# Altium PCB SV06.PcbDoc (part 1 of 3)
Units mil, origin at the board's own origin, x right, y up, seen from the top; angles counter-clockwise.
Board outline 3960.63 x 2763.78 mil, 2 copper layers (Top, Bottom), stack 12.7 mil thick; 211 components, 173 nets, 726 pads, 644 vias.
Unrouted connection lines stored in the file: 411.
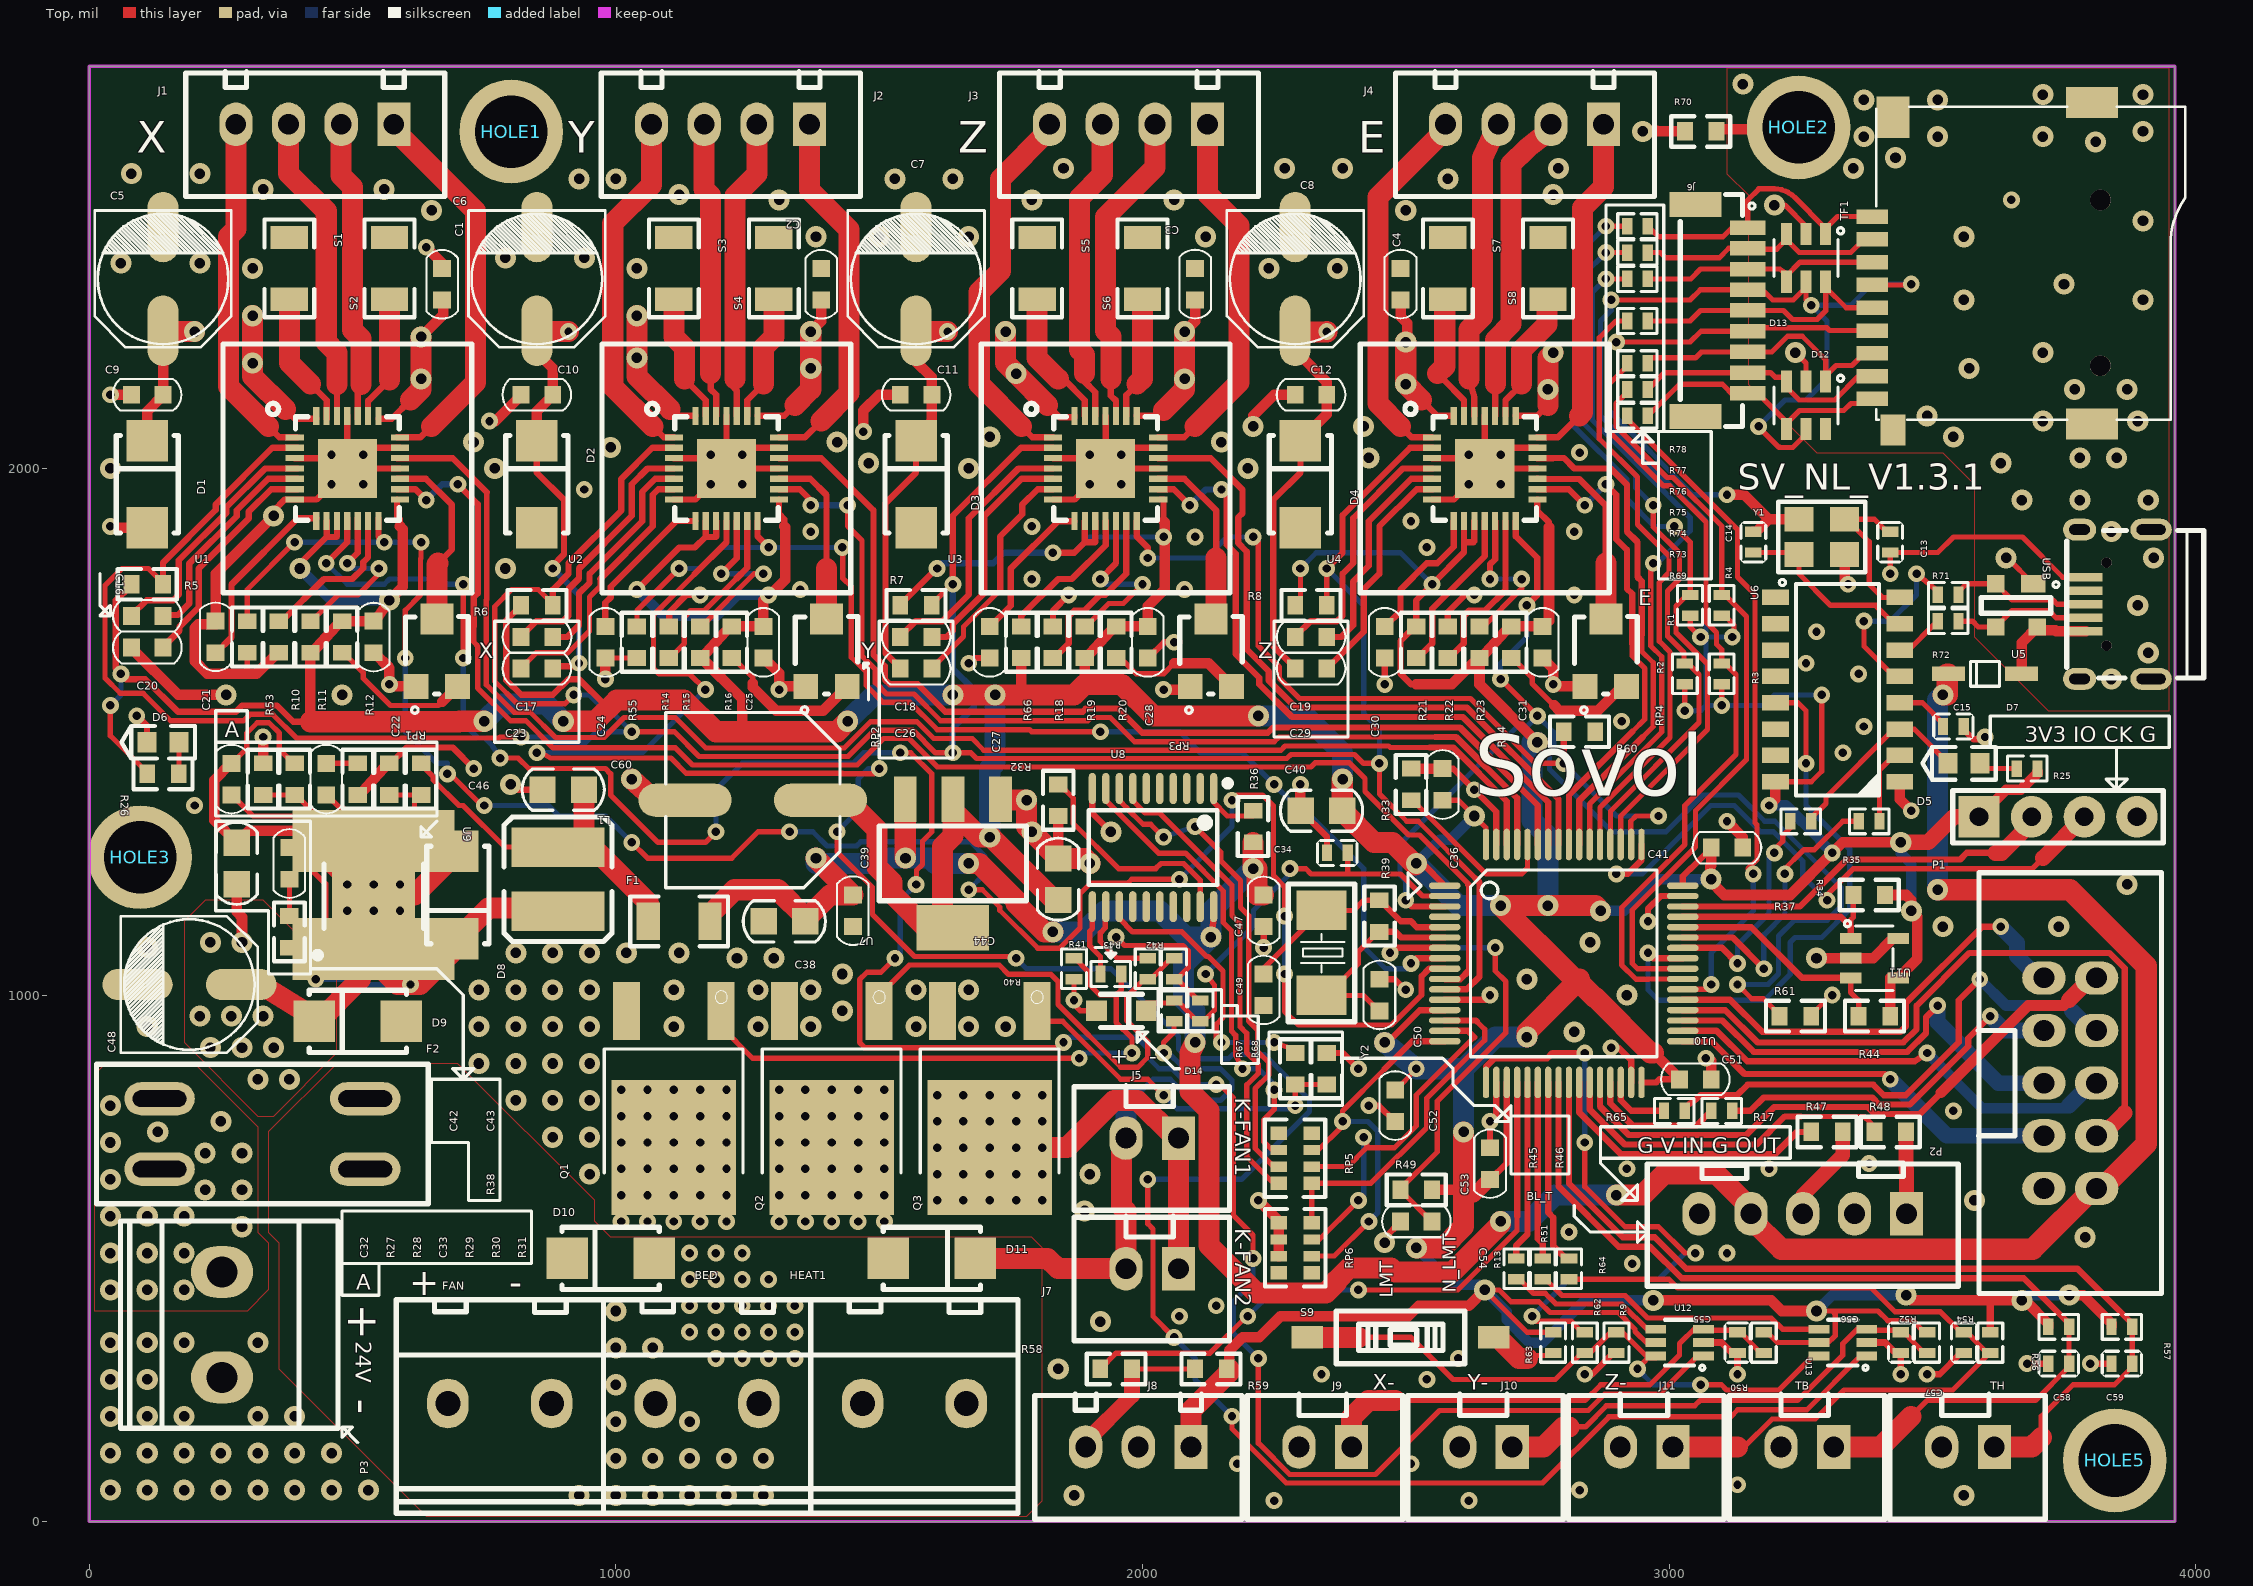
[diagram p0: Top view]
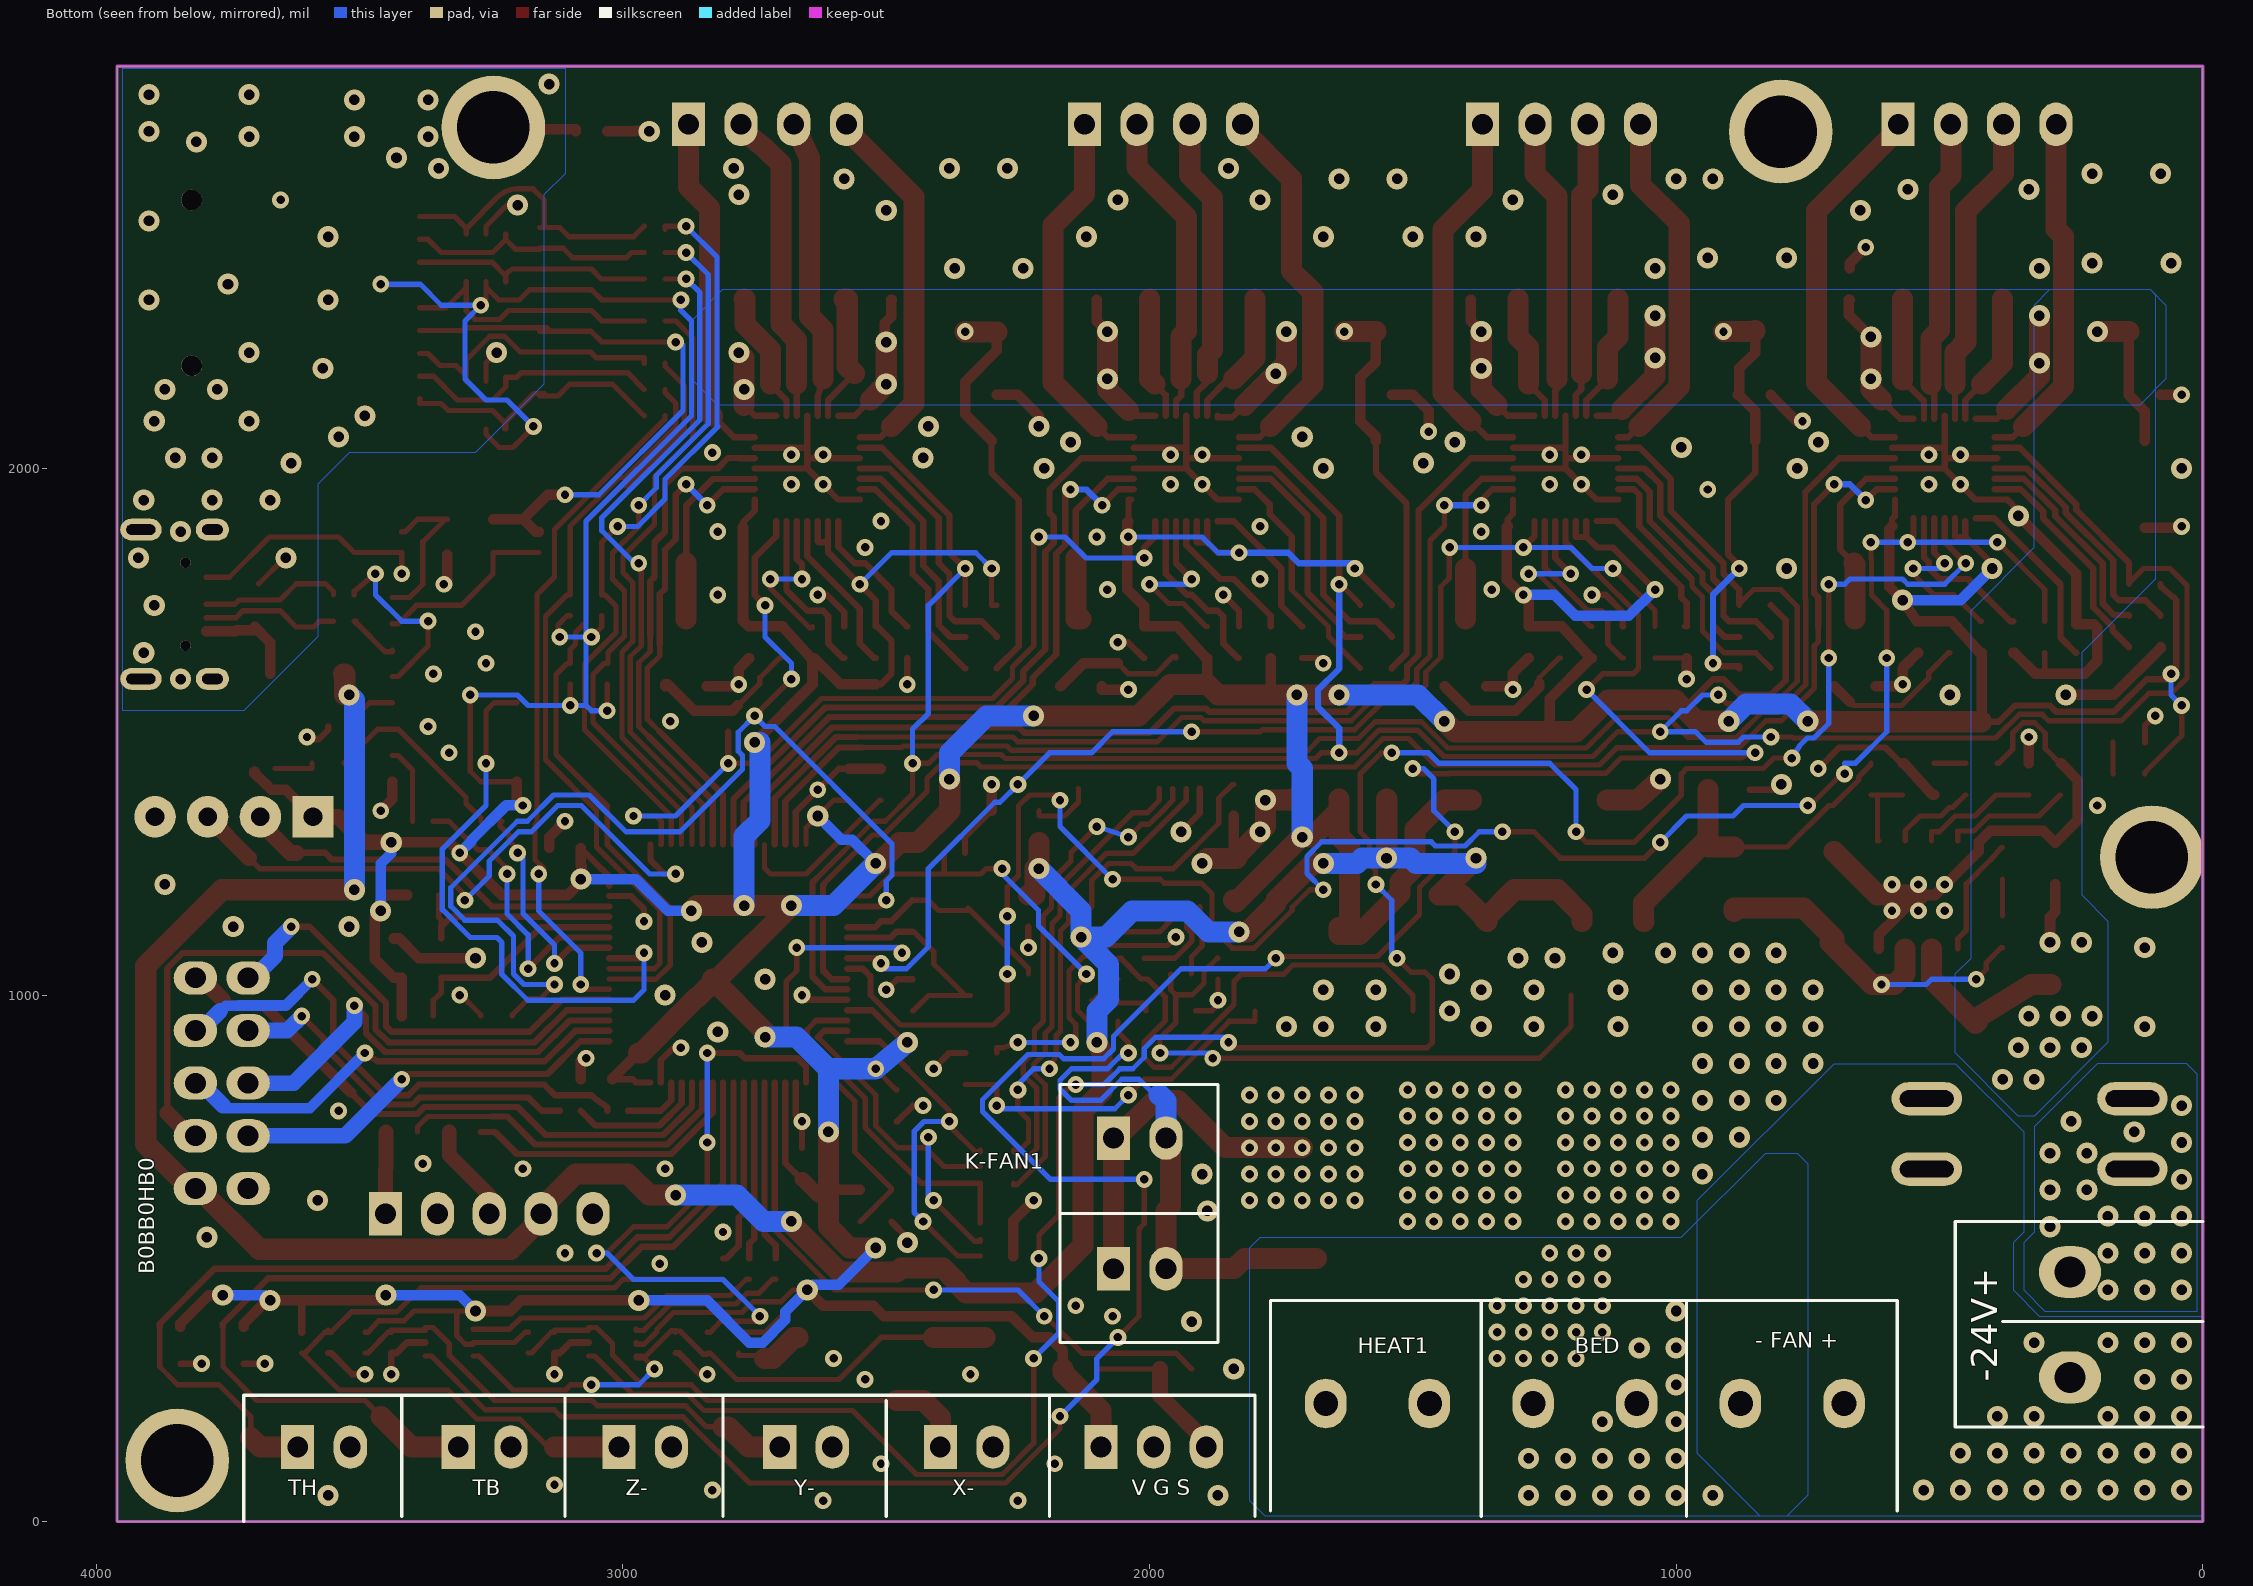
[diagram p1: Bottom view, seen from below]

## Layer stack, top to bottom
Solder Mask Top: solder mask 0.4, Solder Resist, Dk 3.5
Top: signal copper 1.35
Dielectric 1: dielectric 10, FR-4, Dk 4.3
Bottom: signal copper 1.35
Solder Mask Bottom: solder mask 0.4, Solder Resist, Dk 3.5

## Board outline
0,0 3960.63,0 3960.63,2763.78 0,2763.78

## Design rules (kind name [scope] priority, off if disabled: settings)
AssemblyTestPointUsage [All] p0: scope1count=1 scope1_0_kind=Board scope1_0_value=Board scope2count=1 scope2_0_kind=Board scope2_0_value=Board commentlength=0
AssemblyTestpoint [All] p0: scope1count=1 scope1_0_kind=Board scope1_0_value=Board scope2count=1 scope2_0_kind=Board scope2_0_value=Board commentlength=0
Clearance "Clearance - Default - DEFAULT - Net" [All] p0: scope1count=1 scope1_0_kind=Board scope1_0_value=Board scope2count=1 scope2_0_kind=Board scope2_0_value=Board commentlength=0 gap=6
Clearance "Clearance - Default - DEFAULT - Via" [All] p0 off: scope1count=1 scope1_0_kind=Board scope1_0_value=Board scope2count=1 scope2_0_kind=Board scope2_0_value=Board commentlength=44 gap=6 // Protel DXP Scope 2 Expression Was: IsVia
Clearance "Clearance - Default - DEFAULT- SMD" [All] p0 off: scope1count=1 scope1_0_kind=Board scope1_0_value=Board scope2count=1 scope2_0_kind=Board scope2_0_value=Board commentlength=47 gap=6 // Protel DXP Scope 2 Expression Was: IsSMTPin
Clearance "Clearance - Default - DEFAULT- SMD" [IsVia vs IsSMTPin] p1: gap=6
Clearance "Clearance - Default - DEFAULT - Via" [IsVia vs IsVia] p2: gap=6
Clearance "Clearance - Default - DEFAULT - Net" [All] p3: gap=6 except(8: Arc-Fill Arc-Poly Arc-Region Track-Fill Track-Poly Track-Region SMDPad-Fill SMDPad-Poly SMDPad-Region THPad-Fill THPad-Poly THPad-Region Via-Fill Via-Poly Via-Region; 10: Fill-Fill Fill-Poly Fill-Region Poly-Poly Poly-Region Region-Region Text-Text)
ComponentClearance "ComponentClearance - Default - DEFAULT" [All] p0: scope1count=1 scope1_0_kind=Board scope1_0_value=Board scope2count=1 scope2_0_kind=Board scope2_0_value=Board commentlength=0 gap=6 collisioncheckmode=3
ComponentClearance "ComponentClearance - Default - DEFAULT" [All] p1: gap=6 collisioncheckmode=3 verticalgap=10 showdistances=FALSE
DiffPairsRouting [All] p0: scope1count=1 scope1_0_kind=Board scope1_0_value=Board scope2count=1 scope2_0_kind=Board scope2_0_value=Board commentlength=0
FabricationTestPointUsage [All] p0: scope1count=1 scope1_0_kind=Board scope1_0_value=Board scope2count=1 scope2_0_kind=Board scope2_0_value=Board commentlength=0 valid=0 allowmultiple=FALSE
FabricationTestpoint [All] p0: scope1count=1 scope1_0_kind=Board scope1_0_value=Board scope2count=1 scope2_0_kind=Board scope2_0_value=Board commentlength=0 side=3 testpointundercomponent=TRUE minsize=40 maxsize=100 preferedsize=60 minholesize=0 maxholesize=40 preferedholesize=32 testpointgrid=1
FanoutControl Fanout_Default [All] p0: scope1count=1 scope1_0_kind=Board scope1_0_value=Board scope2count=1 scope2_0_kind=Board scope2_0_value=Board commentlength=30 // Fanout_Default (Default Rule)
FanoutControl Fanout_SOIC [All] p0 off: scope1count=1 scope1_0_kind=Board scope1_0_value=Board scope2count=1 scope2_0_kind=Board scope2_0_value=Board commentlength=71 // Protel DXP Scope 1 Expression Was: IsSOIC   Fanout_SOIC (Default Rule)
FanoutControl Fanout_Small [All] p0 off: scope1count=1 scope1_0_kind=Board scope1_0_value=Board scope2count=1 scope2_0_kind=Board scope2_0_value=Board commentlength=84 // Protel DXP Scope 1 Expression Was: (CompPinCount < 5)   Fanout_Small (Default Rule)
FanoutControl Fanout_LCC [All] p0 off: scope1count=1 scope1_0_kind=Board scope1_0_value=Board scope2count=1 scope2_0_kind=Board scope2_0_value=Board commentlength=69 // Protel DXP Scope 1 Expression Was: IsLCC   Fanout_LCC (Default Rule)
FanoutControl Fanout_BGA [All] p0 off: scope1count=1 scope1_0_kind=Board scope1_0_value=Board scope2count=1 scope2_0_kind=Board scope2_0_value=Board commentlength=69 // Protel DXP Scope 1 Expression Was: IsBGA   Fanout_BGA (Default Rule)
FanoutControl Fanout_Small [(CompPinCount < 5)] p3: bgadir=Out bgaviamode=Centered fanoutstyle=Auto fanoutdirection=OutThenIn viagrid=1 // Fanout_Small (Default Rule)
FanoutControl Fanout_SOIC [IsSOIC] p4: bgadir=Out bgaviamode=Centered fanoutstyle=Auto fanoutdirection=Alternating viagrid=1 // Fanout_SOIC (Default Rule)
Height [All] p0: scope1count=1 scope1_0_kind=Board scope1_0_value=Board scope2count=1 scope2_0_kind=Board scope2_0_value=Board commentlength=0
HoleSize [All] p0: scope1count=1 scope1_0_kind=Board scope1_0_value=Board scope2count=1 scope2_0_kind=Board scope2_0_value=Board commentlength=0 absolutevalues=TRUE maxlimit=100 minlimit=1 maxpercent=80.000 minpercent=20.000
HoleToHoleClearance "HoleToHoleClearance - Default - DEFAULT" [All] p0: scope1count=1 scope1_0_kind=Board scope1_0_value=Board scope2count=1 scope2_0_kind=Board scope2_0_value=Board commentlength=0
HoleToHoleClearance "HoleToHoleClearance - Default - DEFAULT" [All] p1: gap=6 allowstackedmicrovias=TRUE
LayerPairs [All] p0: scope1count=1 scope1_0_kind=Board scope1_0_value=Board scope2count=1 scope2_0_kind=Board scope2_0_value=Board commentlength=0 enforce=TRUE
Length "Default Length" [All] p0: scope1count=1 scope1_0_kind=Board scope1_0_value=Board scope2count=1 scope2_0_kind=Board scope2_0_value=Board commentlength=0 maxlimit=50000 minlimit=0
Length "Default Length" [All] p1: maxlimit=50000 minlimit=0
MaxMinImpedance "Default Impedance" [All] p0: scope1count=1 scope1_0_kind=Board scope1_0_value=Board scope2count=1 scope2_0_kind=Board scope2_0_value=Board commentlength=0 minimum=50.00 maximum=150.0
MaxMinImpedance "Default Impedance" [All] p1: minimum=50.00 maximum=150.0
MinimumSolderMaskSliver [All] p0: scope1count=1 scope1_0_kind=Board scope1_0_value=Board scope2count=1 scope2_0_kind=Board scope2_0_value=Board commentlength=0
NetAntennae [All] p0: scope1count=1 scope1_0_kind=Board scope1_0_value=Board scope2count=1 scope2_0_kind=Board scope2_0_value=Board commentlength=0
ParallelSegment "Default Parallel Segment Same Layer" [All] p0: scope1count=1 scope1_0_kind=Board scope1_0_value=Board scope2count=1 scope2_0_kind=Board scope2_0_value=Board commentlength=0 limit=1000 gap=200
ParallelSegment "Default Parallel Segment Adjasent" [All] p0: scope1count=1 scope1_0_kind=Board scope1_0_value=Board scope2count=1 scope2_0_kind=Board scope2_0_value=Board commentlength=0 limit=1000 gap=200
ParallelSegment "Default Parallel Segment Adjasent" [All] p1: limit=1000 gap=200
ParallelSegment "Default Parallel Segment Same Layer" [All] p2: limit=1000 gap=200
PasteMaskExpansion [All] p0: scope1count=1 scope1_0_kind=Board scope1_0_value=Board scope2count=1 scope2_0_kind=Board scope2_0_value=Board commentlength=0 expansion=0
PlaneClearance [All] p0: scope1count=1 scope1_0_kind=Board scope1_0_value=Board scope2count=1 scope2_0_kind=Board scope2_0_value=Board commentlength=0 clearance=20
PlaneConnect "Default PlaneConnect" [All] p0: scope1count=1 scope1_0_kind=Board scope1_0_value=Board scope2count=1 scope2_0_kind=Board scope2_0_value=Board commentlength=0 planeconnectstyle=Relief reliefexpansion=20 reliefentries=0 reliefconductorwidth=15 reliefairgap=10
PlaneConnect "Default PlaneConnect" [All] p1: planeconnectstyle=Relief reliefexpansion=20 reliefentries=0 reliefconductorwidth=15 reliefairgap=10
PolygonConnect "PolygonConnect - Default Pad" [All] p0: scope1count=1 scope1_0_kind=Board scope1_0_value=Board scope2count=1 scope2_0_kind=Board scope2_0_value=Board commentlength=0 connectstyle=Relief reliefconductorwidth=15 reliefentries=4 polygonreliefangle="45 Angle"
PolygonConnect "PolygonConnect - Default SMT" [All] p0 off: scope1count=1 scope1_0_kind=Board scope1_0_value=Board scope2count=1 scope2_0_kind=Board scope2_0_value=Board commentlength=47 connectstyle=Relief reliefconductorwidth=15 reliefentries=4 polygonreliefangle="90 Angle" // Protel DXP Scope 1 Expression Was: IsSMTPin
PolygonConnect "PolygonConnect - Default SMT" [IsSMTPin] p1: connectstyle=Relief reliefconductorwidth=15 reliefentries=4 polygonreliefangle="90 Angle" airgapwidth=10
PolygonConnect "PolygonConnect - Default Pad" [All] p2: connectstyle=Relief reliefconductorwidth=15 reliefentries=4 polygonreliefangle="45 Angle" airgapwidth=10
RoutingCorners [All] p0: scope1count=1 scope1_0_kind=Board scope1_0_value=Board scope2count=1 scope2_0_kind=Board scope2_0_value=Board commentlength=0 cornerstyle=45-Degree minsetback=100 maxsetback=100
RoutingLayers "RoutingLayers - Default - DEFAULT" [All] p0: scope1count=1 scope1_0_kind=Board scope1_0_value=Board scope2count=1 scope2_0_kind=Board scope2_0_value=Board commentlength=0 top layer=Automatic bottom layer=Automatic
RoutingLayers "RoutingLayers - Default - DEFAULT" [All] p1: top layer_v5=TRUE bottom layer_v5=TRUE
RoutingPriority "RoutingPriority - Default - DEFAULT" [All] p1: routingpriority=3
RoutingPriority "RoutingPriority - Default - DEFAULT" [All] p3: scope1count=1 scope1_0_kind=Board scope1_0_value=Board scope2count=1 scope2_0_kind=Board scope2_0_value=Board commentlength=0
RoutingTopology "Default Routing Topology" [All] p0: scope1count=1 scope1_0_kind=Board scope1_0_value=Board scope2count=1 scope2_0_kind=Board scope2_0_value=Board commentlength=0 topology=Shortest
RoutingTopology "Default Routing Topology" [All] p1: topology=Shortest
RoutingVias "RoutingVias - Default - DEFAULT" [All] p0: scope1count=1 scope1_0_kind=Board scope1_0_value=Board scope2count=1 scope2_0_kind=Board scope2_0_value=Board commentlength=0 holewidth=16 width=32 viastyle="Through Hole" minholewidth=16 minwidth=32 maxholewidth=16 maxwidth=32
RoutingVias "RoutingVias - Default - DEFAULT" [All] p1: holewidth=16 width=32 viastyle="Through Hole" minholewidth=16 minwidth=32 maxholewidth=16 maxwidth=32
SMDToCorner "SMDToCorner - Default - DEFAULT" [All] p0: scope1count=1 scope1_0_kind=Board scope1_0_value=Board scope2count=1 scope2_0_kind=Board scope2_0_value=Board commentlength=0 distance=60000
SMDToCorner "SMDToCorner - Default - DEFAULT" [All] p1: distance=60000
ShortCircuit [All] p0: scope1count=1 scope1_0_kind=Board scope1_0_value=Board scope2count=1 scope2_0_kind=Board scope2_0_value=Board commentlength=0 allowed=FALSE
SilkToBoardRegionClearance [All] p0: scope1count=1 scope1_0_kind=Board scope1_0_value=Board scope2count=1 scope2_0_kind=Board scope2_0_value=Board commentlength=0
SilkToSilkClearance [All] p0: scope1count=1 scope1_0_kind=Board scope1_0_value=Board scope2count=1 scope2_0_kind=Board scope2_0_value=Board commentlength=0
SilkToSolderMaskClearance [All] p0 off: scope1count=1 scope1_0_kind=Board scope1_0_value=Board scope2count=1 scope2_0_kind=Board scope2_0_value=Board commentlength=44 // Protel DXP Scope 1 Expression Was: IsPad
SolderMaskExpansion [All] p0: scope1count=1 scope1_0_kind=Board scope1_0_value=Board scope2count=1 scope2_0_kind=Board scope2_0_value=Board commentlength=0 expansion=4
SolderMaskExpansion [All] p1: expansion=4
UnRoutedNet [All] p0: scope1count=1 scope1_0_kind=Board scope1_0_value=Board scope2count=1 scope2_0_kind=Board scope2_0_value=Board commentlength=0
UnpouredPolygon [All] p0: scope1count=1 scope1_0_kind=Board scope1_0_value=Board scope2count=1 scope2_0_kind=Board scope2_0_value=Board commentlength=0
Width "Default Width" [All] p0: scope1count=1 scope1_0_kind=Board scope1_0_value=Board scope2count=1 scope2_0_kind=Board scope2_0_value=Board commentlength=0 maxlimit=250 minlimit=6 preferedwidth=12
Width "Default Width" [All] p1: maxlimit=250 minlimit=6 preferedwidth=12
22 further rules are at their usual default settings.

## Components (designator, comment, footprint, x,y, rotation, side; value= is the part's Value field where it differs from the comment)
BED "CONN-TH_2P-P5.00_WJ128V-5.0-2P_2X2.4_10" CONN-TH_2P-P5.00_WJ128V-5.0-2P_2X2.4_10 1173.23,224.41 r0 top
BL_T "2.54_XH-5A_SX_X_1_1.6_2.1" 2.54_XH-5A_SX_X_1_1.6_2.1 3253.94,584.65 r180 top
C1 "C0603" C0603 670,2350 r270 top
C2 "C0603" C0603 1390,2350 r270 top
C3 "C0603" C0603 2100,2350 r90 top
C4 "C0603" C0603 2490,2350 r90 top
C5 "ECAP_SMD_6D_X_1.5X3.4" ECAP_SMD_6D_X_1.5X3.4 140,2360 r180 top
C6 "ECAP_SMD_6D_X_1.5X3.4" ECAP_SMD_6D_X_1.5X3.4 850,2360 r180 top
C7 "ECAP_SMD_6D_X_1.5X3.4" ECAP_SMD_6D_X_1.5X3.4 1570,2360 r180 top
C8 "ECAP_SMD_6D_X_1.5X3.4" ECAP_SMD_6D_X_1.5X3.4 2290,2360 r180 top
C9 "C0603" C0603 110,2140 r180 top
C10 "C0603" C0603 850,2140 r180 top
C11 "C0603" C0603 1570,2140 r0 top
C12 "C0603" C0603 2320,2140 r0 top
C13 "C0402_LC" C0402_LC 3420,1860 r90 top
C14 "C0402_LC" C0402_LC 3160,1860 r90 top
C15 "C0402_LC" C0402_LC 3540,1510 r0 top
C16 "C0603" C0603 110,1720 r0 top
C17 "C0603" C0603 850,1680 r0 top
C18 "C0603" C0603 1570,1680 r0 top
C19 "C0603" C0603 2320,1680 r0 top
C20 "C0603" C0603 110,1660 r0 top
C21 "C0603" C0603 240,1680 r90 top
C22 "C0603" C0603 540,1680 r270 top
C23 "C0603" C0603 850,1620 r180 top
C24 "C0603" C0603 980,1670 r270 top
C25 "C0603" C0603 1280,1670 r270 top
C26 "C0603" C0603 1570,1620 r0 top
C27 "C0603" C0603 1710,1670 r270 top
C28 "C0603" C0603 2010,1670 r270 top
C29 "C0603" C0603 2320,1620 r0 top
C30 "C0603" C0603 2460,1670 r270 top
C31 "C0603" C0603 2760,1670 r270 top
C32 "C0603" C0603 270,1410 r90 top
C33 "C0603" C0603 450,1410 r90 top
C34 "C0402_LC" C0402_LC 2370,1270 r180 top
C36 "C0603" C0603 2570,1400 r270 top
C38 "C0805" C0805 1320,1140 r180 top
C39 "C0603" C0603 1450,1160 r90 top
C40 "C0805" C0805 2340,1350 r0 top
C41 "C0603" C0603 3110,1280 r180 top
C42 "C0805" C0805 280,1250 r90 top
C43 "C0603" C0603 380,1250 r270 top
C44 "C0805" C0805 1840,1220 r90 top
C46 "C0805" C0805 900,1390 r180 top
C47 "C0603" C0603 2230,1160 r270 top
C48 "ECAP_SMD_6D_X_1.5X3.4" ECAP_SMD_6D_X_1.5X3.4 190,1020 r270 top
C49 "C0603" C0603 2230,1010 r270 top
C50 "C0603" C0603 2450,1000 r90 top
C51 "C0603" C0603 3050,840 r180 top
C52 "C0603" C0603 2480,790 r90 top
C53 "C0603" C0603 2660,680 r270 top
C54 "C0603" C0603 2520,570 r0 top
C55 "C0402_LC" C0402_LC 3130,340 r90 top
C56 "C0402_LC" C0402_LC 3440,340 r90 top
C57 "C0402_LC" C0402_LC 3560,340 r90 top
C58 "C0402_LC" C0402_LC 3740,300 r180 top
C59 "C0402_LC" C0402_LC 3860,300 r180 top
C60 "CAP-SMD_BD8.0-L8.3-W8.3-FD_2" CAP-SMD_BD8.0-L8.3-W8.3-FD_2 1260,1370 r180 top
D1 "LC-SMA(DO-214AC)_S1" LC-SMA(DO-214AC)_S1 110,1970 r270 top
D2 "LC-SMA(DO-214AC)_S1" LC-SMA(DO-214AC)_S1 850,1970 r270 top
D3 "LC-SMA(DO-214AC)_S1" LC-SMA(DO-214AC)_S1 1570,1970 r270 top
D4 "LC-SMA(DO-214AC)_S1" LC-SMA(DO-214AC)_S1 2300,1970 r270 top
D5 "LC-0603_LED_S3" LC-0603_LED_S3 3560,1440 r0 top
D6 "LC-0603_LED_S3" LC-0603_LED_S3 140,1480 r0 top
D7 "WH-SOD-123" WH-SOD-123 3600,1610 r0 top
D8 "LC-SMA(DO-214AC)_S1" LC-SMA(DO-214AC)_S1 700,1190 r90 top
D9 "LC-SMA(DO-214AC)_S1" LC-SMA(DO-214AC)_S1 510,950 r0 top
D10 "LC-SMA(DO-214AC)_S1" LC-SMA(DO-214AC)_S1 990,500 r0 top
D11 "LC-SMA(DO-214AC)_S1" LC-SMA(DO-214AC)_S1 1600,500 r180 top
D12 "SOT-23-6_L2.9-W1.6-P0.95-LS2.8-BL_2" SOT-23-6_L2.9-W1.6-P0.95-LS2.8-BL_2 3260,2120 r180 top
D13 "SOT-23-6_L2.9-W1.6-P0.95-LS2.8-BL_2" SOT-23-6_L2.9-W1.6-P0.95-LS2.8-BL_2 3260,2400 r180 top
D14 "SOD-323_L1.8-W1.3-LS2.5-RD" SOD-323_L1.8-W1.3-LS2.5-RD 1960,970 r180 top
F1 "LC-1206_R" LC-1206_R 1120,1140 r0 top
F2 "Z-506B" Z-506B 328.74,736.22 r0 top
FAN "CONN-TH_2P-P5.00_WJ128V-5.0-2P_2X2.4_10" CONN-TH_2P-P5.00_WJ128V-5.0-2P_2X2.4_10 779.53,224.41 r0 top
HEAT1 "CONN-TH_2P-P5.00_WJ128V-5.0-2P_2X2.4_10" CONN-TH_2P-P5.00_WJ128V-5.0-2P_2X2.4_10 1566.93,224.41 r0 top
HOLE1 "MACH3.5_5" MACH3.5_5 801.18,2639.76 r0 top
HOLE2 "MACH3.5_5" MACH3.5_5 3246.06,2647.64 r0 top
HOLE3 "MACH3.5_5" MACH3.5_5 96.46,1261.81 r0 top
HOLE5 "MACH3.5_5" MACH3.5_5 3846.46,116.14 r0 top
J1 "2.54_XH-4A_SX_X_1_1.6_2.1" 2.54_XH-4A_SX_X_1_1.6_2.1 478.35,2653.54 r180 top
J2 "2.54_XH-4A_SX_X_1_1.6_2.1" 2.54_XH-4A_SX_X_1_1.6_2.1 1267.72,2653.54 r180 top
J3 "2.54_XH-4A_SX_X_1_1.6_2.1" 2.54_XH-4A_SX_X_1_1.6_2.1 2023.62,2653.54 r180 top
J4 "2.54_XH-4A_SX_X_1_1.6_2.1" 2.54_XH-4A_SX_X_1_1.6_2.1 2775.59,2653.54 r180 top
J5 "2.54_XH-2A_SX_X_1_1.6_2.1" 2.54_XH-2A_SX_X_1_1.6_2.1 1968.5,728.35 r180 top
J6 "CONN-SMD_9P-P1.00_HCTL_HC-1.0-9PL_2" CONN-SMD_9P-P1.00_HCTL_HC-1.0-9PL_2 3100,2300 r270 top
J7 "2.54_XH-2A_SX_X_1_1.6_2.1" 2.54_XH-2A_SX_X_1_1.6_2.1 1968.5,480.31 r180 top
J8 "2.54_XH-3A_SX_1_1.6_2.1" 2.54_XH-3A_SX_1_1.6_2.1 1992.13,141.73 r180 top
J9 "2.54_XH-2A_SX_X_1_1.6_2.1" 2.54_XH-2A_SX_X_1_1.6_2.1 2297.24,141.73 r180 top
J10 "2.54_XH-2A_SX_X_1_1.6_2.1" 2.54_XH-2A_SX_X_1_1.6_2.1 2602.36,141.73 r180 top
J11 "2.54_XH-2A_SX_X_1_1.6_2.1" 2.54_XH-2A_SX_X_1_1.6_2.1 2907.48,141.73 r180 top
L1 "IND-SMD_L4.5-W4.0" IND-SMD_L4.5-W4.0 890,1220 r90 top
P1 "SIP-4P_X" SIP-4P_X 3588.58,1338.58 r0 top
P2 "IDC-TH_10P-P2.54_1X2.1X1.6" IDC-TH_10P-P2.54_1X2.1X1.6 3761.81,832.68 r270 top
P3 "CONN-TH_2P-P5.00_WJ129V-5.00-2P_2.5X3" CONN-TH_2P-P5.00_WJ129V-5.00-2P_2.5X3 251.97,374.02 r90 top
Q1 "TO-252-2_L6.6-W6.1-P4.57-LS9.9-TL-CW_1" TO-252-2_L6.6-W6.1-P4.57-LS9.9-TL-CW_1 1110,840 r270 top
Q2 "TO-252-2_L6.6-W6.1-P4.57-LS9.9-TL-CW_1" TO-252-2_L6.6-W6.1-P4.57-LS9.9-TL-CW_1 1410,840 r270 top
Q3 "TO-252-2_L6.6-W6.1-P4.57-LS9.9-TL-CW_1" TO-252-2_L6.6-W6.1-P4.57-LS9.9-TL-CW_1 1710,840 r270 top
R1 "R0402_LC" R0402_LC 3040,1740 r270 top
R2 "R0402_LC" R0402_LC 3030,1610 r270 top
R3 "R0402_LC" R0402_LC 3100,1610 r270 top
R4 "R0402_LC" R0402_LC 3100,1740 r270 top
R5 "R0603" R0603 110,1780 r180 top
R6 "R0603" R0603 850,1740 r180 top
R7 "R0603" R0603 1570,1740 r180 top
R8 "R0603" R0603 2320,1740 r180 top
R9 "R0402_LC" R0402_LC 2900,340 r90 top
R10 "R0603" R0603 360,1680 r270 top
R11 "R0603" R0603 420,1680 r270 top
R12 "R0603" R0603 480,1680 r90 top
R13 "R0402_LC" R0402_LC 2710,480 r90 top
R14 "R0603" R0603 1100,1670 r90 top
R15 "R0603" R0603 1160,1670 r270 top
R16 "R0603" R0603 1220,1670 r90 top
R17 "R0402_LC" R0402_LC 3100,780 r0 top
R18 "R0603" R0603 1830,1670 r90 top
R19 "R0603" R0603 1890,1670 r270 top
R20 "R0603" R0603 1950,1670 r90 top
R21 "R0603" R0603 2520,1670 r90 top
R22 "R0603" R0603 2580,1670 r90 top
R23 "R0603" R0603 2640,1670 r270 top
R24 "R0603" R0603 2700,1670 r90 top
R25 "R0402_LC" R0402_LC 3680,1430 r0 top
R26 "R0603" R0603 140,1420 r180 top
R27 "R0603" R0603 330,1410 r90 top
R28 "R0603" R0603 390,1410 r270 top
R29 "R0603" R0603 510,1410 r90 top
R30 "R0603" R0603 570,1410 r270 top
R31 "R0603" R0603 630,1410 r90 top
R32 "R0603" R0603 1840,1370 r270 top
R33 "R0603" R0603 2510,1400 r90 top
R34 "R0402_LC" R0402_LC 3250,1330 r180 top
R35 "R0402_LC" R0402_LC 3380,1330 r180 top
R36 "R0603" R0603 2210,1320 r90 top
R37 "R0603" R0603 3380,1190 r180 top
R38 "R0603" R0603 380,1120 r270 top
R39 "R0603" R0603 2450,1150 r90 top
R40 "R0402_LC" R0402_LC 1870,1050 r270 top
R41 "R0402_LC" R0402_LC 1940,1040 r0 top
R42 "R0402_LC" R0402_LC 2060,1050 r270 top
R43 "R0402_LC" R0402_LC 2010,1050 r270 top
R44 "R0603" R0603 3390,960 r180 top
R45 "R0603" R0603 2290,860 r270 top
R46 "R0603" R0603 2350,860 r90 top
R47 "R0603" R0603 3300,740 r0 top
R48 "R0603" R0603 3420,740 r0 top
R49 "R0603" R0603 2520,630 r0 top
R50 "R0402_LC" R0402_LC 3180,340 r90 top
R51 "R0402_LC" R0402_LC 2760,480 r90 top
R52 "R0402_LC" R0402_LC 3490,340 r90 top
R53 "R0603" R0603 300,1680 r270 top
R54 "R0402_LC" R0402_LC 3610,340 r90 top
R55 "R0603" R0603 1040,1670 r270 top
R56 "R0402_LC" R0402_LC 3740,370 r180 top
R57 "R0402_LC" R0402_LC 3860,370 r180 top
R58 "R0603" R0603 1950,290 r0 top
R59 "R0603" R0603 2130,290 r0 top
R60 "R0603" R0603 2830,1500 r0 top
R61 "R0603" R0603 3240,960 r0 top
R62 "R0402_LC" R0402_LC 2840,340 r90 top
R63 "R0402_LC" R0402_LC 2780,340 r90 top
R64 "R0402_LC" R0402_LC 2810,480 r270 top
R65 "R0402_LC" R0402_LC 3010,780 r180 top
R66 "R0603" R0603 1770,1670 r270 top
R67 "R0402_LC" R0402_LC 2060,970 r270 top
R68 "R0402_LC" R0402_LC 2110,970 r270 top
R69 "R0402_LC" R0402_LC 2940,2100 r180 top
R70 "R0603" R0603 3060,2640 r180 top
R71 "R0402_LC" R0402_LC 3530,1760 r180 top
R72 "R0402_LC" R0402_LC 3530,1710 r180 top
R73 "R0402_LC" R0402_LC 2940,2150 r180 top
R74 "R0402_LC" R0402_LC 2940,2200 r180 top
R75 "R0402_LC" R0402_LC 2940,2280 r180 top
R76 "R0402_LC" R0402_LC 2940,2360 r180 top
R77 "R0402_LC" R0402_LC 2940,2410 r180 top
R78 "R0402_LC" R0402_LC 2940,2460 r180 top
RP1 "RES-ADJ-SMD_3P-L3.0-W3.8-P1.75-BR" RES-ADJ-SMD_3P-L3.0-W3.8-P1.75-BR 660,1650 r270 top
RP2 "RES-ADJ-SMD_3P-L3.0-W3.8-P1.75-BR" RES-ADJ-SMD_3P-L3.0-W3.8-P1.75-BR 1400,1650 r270 top
RP3 "RES-ADJ-SMD_3P-L3.0-W3.8-P1.75-BR" RES-ADJ-SMD_3P-L3.0-W3.8-P1.75-BR 2130,1650 r270 top
RP4 "RES-ADJ-SMD_3P-L3.0-W3.8-P1.75-BR" RES-ADJ-SMD_3P-L3.0-W3.8-P1.75-BR 2880,1650 r270 top
RP5 "RES-ARRAY-SMD_0603-8P-L3.2-W1.6-BL" RES-ARRAY-SMD_0603-8P-L3.2-W1.6-BL 2290,690 r90 top
RP6 "RES-ARRAY-SMD_0603-8P-L3.2-W1.6-BL" RES-ARRAY-SMD_0603-8P-L3.2-W1.6-BL 2290,520 r270 top
S1 "LC-1206_R" LC-1206_R 380,2380 r270 top
S2 "LC-1206_R" LC-1206_R 570,2380 r270 top
S3 "LC-1206_R" LC-1206_R 1110,2380 r270 top
S4 "LC-1206_R" LC-1206_R 1300,2380 r270 top
S5 "LC-1206_R" LC-1206_R 1800,2380 r270 top
S6 "LC-1206_R" LC-1206_R 2000,2380 r270 top
S7 "LC-1206_R" LC-1206_R 2580,2380 r270 top
S8 "LC-1206_R" LC-1206_R 2770,2380 r270 top
S9 "SW-SMD_2P-L6.2-W2.5-LS9.8_1" SW-SMD_2P-L6.2-W2.5-LS9.8_1 2490,350 r0 top
TB "2.54_XH-2A_SX_X_1_1.6_2.1" 2.54_XH-2A_SX_X_1_1.6_2.1 3212.6,141.73 r180 top
TF1 "TF-09PIN" TF-09PIN 3948.82,2352.36 r90 top
TH "2.54_XH-2A_SX_X_1_1.6_2.1" 2.54_XH-2A_SX_X_1_1.6_2.1 3517.72,141.73 r180 top
U1 "WH-QFN-28_5X5X05P_9JR" WH-QFN-28_5X5X05P_9JR 490,2000 r0 top
U2 "WH-QFN-28_5X5X05P_9JR" WH-QFN-28_5X5X05P_9JR 1210,2000 r0 top
U3 "WH-QFN-28_5X5X05P_9JR" WH-QFN-28_5X5X05P_9JR 1930,2000 r0 top
U4 "WH-QFN-28_5X5X05P_9JR" WH-QFN-28_5X5X05P_9JR 2650,2000 r0 top
U5 "SOT-143-4_L2.9-W1.3-P1.92-LS2.3-BL_6" SOT-143-4_L2.9-W1.3-P1.92-LS2.3-BL_6 3660,1740 r180 top
U6 "SOP-16" SOP-16 3320,1580 r90 top
U7 "SOT-223_L6.7-W3.5-P2.30-BR" SOT-223_L6.7-W3.5-P2.30-BR 1640,1250 r90 top
U8 "LC-TSSOP-20" LC-TSSOP-20 2020,1280 r180 top
U9 "LC-SOIC-8_EP_150MIL" LC-SOIC-8_EP_150MIL 540,1190 r0 top
U10 "QFP64$2F$12$2F$0.5" QFP64$2F$12$2F$0.5 2800,1060 r270 top
U11 "TSOT-23-5_L2.9-W1.6-P0.95-LS2.8-BL" TSOT-23-5_L2.9-W1.6-P0.95-LS2.8-BL 3390,1070 r270 top
U12 "SC-70-6_L2.1-W1.3-P0.65-LS2.3-BR_X" SC-70-6_L2.1-W1.3-P0.65-LS2.3-BR_X 3020,340 r0 top
U13 "SC-70-6_L2.1-W1.3-P0.65-LS2.3-BR_X" SC-70-6_L2.1-W1.3-P0.65-LS2.3-BR_X 3330,340 r0 top
USB "MICROUSB_DIP_0.81" MICROUSB_DIP_0.81 3915.35,1742.13 r0 top
Y1 "OSC-SMD_4P-L3.2-W2.5-BL_X" OSC-SMD_4P-L3.2-W2.5-BL_X 3290,1870 r0 top
Y2 "OSC-SMD_L5.0-W3.2" OSC-SMD_L5.0-W3.2 2340,1080 r90 top

## Footprints (in the part's own frame and the unit in brackets; to place one, negate y for a bottom-side part, rotate by r counter-clockwise, add the part's x,y. Pads: shape width x height; smd on the part's side, far side on the other; paste and mask are expansions set on the pad)
2.54_XH-2A_SX_X_1_1.6_2.1 [mm]
  rect 1.6x2.1 / inner oval 1.6x2.1 / far side rect 1.6x2.1 hole 1: 1(-2.54,0)
  oval 1.6x2.1 hole 1: 2(0,0)
  silkscreen extent -5,-2.54 2.5,3.48
2.54_XH-3A_SX_1_1.6_2.1 [mm]
  rect 1.6x2.1 / inner oval 1.6x2.1 / far side rect 1.6x2.1 hole 1: 1(-2.54,0)
  oval 1.6x2.1 hole 1: 2(0,0) 3(2.54,0)
  silkscreen extent -5,-2.54 5,3.48
2.54_XH-4A_SX_X_1_1.6_2.1 [mm]
  rect 1.6x2.1 / inner oval 1.6x2.1 / far side rect 1.6x2.1 hole 1: 1(-2.54,0)
  oval 1.6x2.1 hole 1: 2(0,0) 3(2.54,0) 4(5.08,0)
  silkscreen extent -5,-2.54 7.5,3.48
2.54_XH-5A_SX_X_1_1.6_2.1 [mm]
  rect 1.6x2.1 / inner oval 1.6x2.1 / far side rect 1.6x2.1 hole 1: 1(-5,0)
  oval 1.6x2.1 hole 1: 2(-2.5,0) 3(0,0) 4(2.5,0) 5(5,0)
  silkscreen extent -7.5,-2.44 7.5,3.5
C0402_LC [mm]
  rect 0.5x0.8 smd: 1(-0.5,0) 2(0.5,0)
  silkscreen extent -0.95,-0.6 0.95,0.6
C0603 [mil]
  rect 32x34 smd: 1(-30,0) 2(30,0)
  silkscreen extent -65,-30 65,30
C0805 [mm]
  rect 1.27x1.27 smd: 1(-1,0) 2(1,0)
  silkscreen extent -1.98,-0.99 1.99,0.99
CAP-SMD_BD8.0-L8.3-W8.3-FD_2 [mm]
  oval 4.5x1.6 smd: 1(-3.267,0) 2(3.267,0)
  silkscreen extent -4.2,-4.23 4.2,4.23
CONN-SMD_9P-P1.00_HCTL_HC-1.0-9PL_2 [mm]
  rect 0.7x1.71 smd: 1(-4,1.258) 2(-3,1.258) 3(-2,1.258) 4(-1,1.258) 5(0,1.258) 6(1,1.258) 7(2,1.258) 8(3,1.258) 9(4,1.258)
  rect 1.2x2.5 smd: 10(5.11,-1.257) 11(-5.11,-1.258)
  silkscreen extent -5.6,-2 5.6,1.61
CONN-TH_2P-P5.00_WJ128V-5.0-2P_2X2.4_10 [mm]
  oval 2x2.4 hole 1.2: 1(-2.5,0) 2(2.5,0)
  silkscreen extent -5,-5.3 5,5
CONN-TH_2P-P5.00_WJ129V-5.00-2P_2.5X3 [mm]
  oval 2.5x3 hole 1.5: 1(-2.54,0) 2(2.54,0)
  silkscreen extent -5.01,-5.6 5,4.9
ECAP_SMD_6D_X_1.5X3.4 [mm]
  oval 1.5x3.4 smd: 1(0,2.5) 2(0,-2.5)
  silkscreen extent -3.3,-3.3 3.3,3.3
IDC-TH_10P-P2.54_1X2.1X1.6 [mm]
  oval 1.6x2.1 hole 1: 1(-5.08,-1.27) 2(-5.08,1.27) 3(-2.54,-1.27) 4(-2.54,1.27) 5(0,-1.27) 6(0,1.27) 7(2.54,-1.27) 8(2.54,1.27) 9(5.08,-1.27) 10(5.08,1.27)
  silkscreen extent -10.15,-4.45 10.15,4.4
IND-SMD_L4.5-W4.0 [mm]
  rect 1.9x4.5 smd: 1(-1.55,0) 2(1.55,0)
  silkscreen extent -3,-2.6 3,2.6
LC-0603_LED_S3 [mm]
  rect 0.93x0.98 smd: 1(-0.77,0) 2(0.77,0)
  silkscreen extent -2,-0.79 1.54,0.79
LC-1206_R [mm]
  rect 1.13x1.8 smd: 1(-1.49,0) 2(1.49,0)
  silkscreen extent -2.36,-1.2 2.35,1.2
LC-SMA(DO-214AC)_S1 [mm]
  rrect0% 2x2 smd: 1(-2.1,0) 2(2.1,0)
  silkscreen extent -2.35,-1.5 2.35,1.5
LC-SOIC-8_EP_150MIL [mm]
  rect 4x3 smd: 0(0,0) 1(-1.905,-2.6) 2(-0.635,-2.6) 3(0.635,-2.6) 4(1.905,-2.6) 5(1.905,2.6) 6(0.635,2.6) 7(-0.635,2.6) 8(-1.905,2.6)
  silkscreen extent -2.85,-3.05 2.4,1.5
LC-TSSOP-20 [mm]
  oval 0.35x1.5 smd: 1(-2.925,-2.85) 2(-2.275,-2.85) 3(-1.625,-2.85) 4(-0.975,-2.85) 5(-0.325,-2.85) 6(0.325,-2.85) 7(0.975,-2.85) 8(1.625,-2.85) 9(2.275,-2.85) 10(2.925,-2.85) 11(2.925,2.85) 12(2.275,2.85) 13(1.625,2.85) 14(0.975,2.85) 15(0.325,2.85) 16(-0.325,2.85) 17(-0.975,2.85) 18(-1.625,2.85) 19(-2.275,2.85) 20(-2.925,2.85)
  silkscreen extent -3.75,-3.25 3.1,1.8
MACH3.5_5 [mm]
  round 5 hole 3.5: 1(0,0)
MICROUSB_DIP_0.81 [mm]
  rect 1.6x0.4 smd: 1(-3.15,1.3) 2(-3.15,0.65) 3(-3.15,0) 4(-3.15,-0.65) 5(-3.15,-1.3)
  oval 1.6x1.05 hole 0.5 slot 1 at 0 deg: 6(-3.45,-3.6) 9(-3.45,3.6)
  oval 2x1.05 hole 0.5 slot 1.4 at 0 deg: 7(0,-3.6) 8(0,3.6)
  round 0.5 hole 0.5: 10(-2.15,-2) 11(-2.15,2)
  silkscreen extent -4.06,-3.56 2.54,3.56
OSC-SMD_4P-L3.2-W2.5-BL_X [mm]
  rect 1.4x1.2 smd: 1(-1.1,-0.85) 2(1.1,-0.85) 3(1.1,0.85) 4(-1.1,0.85)
  silkscreen extent -2.1,-2.35 2.1,1.7
OSC-SMD_L5.0-W3.2 [mm]
  rect 1.9x2.4 smd: 1(-2.05,0) 2(2.05,0)
  silkscreen extent -3.32,-1.6 3.33,1.6
QFP64$2F$12$2F$0.5 [mil]
  oval 12x60 smd: 1(-147.64,-225.91) 2(-127.95,-225.91) 3(-108.27,-225.91) 4(-88.58,-225.91) 5(-68.9,-225.91) 6(-49.21,-225.91) 7(-29.53,-225.91) 8(-9.84,-225.91) 9(9.84,-225.91) 10(29.53,-225.91) 11(49.21,-225.91) 12(68.9,-225.91) 13(88.58,-225.91) 14(108.27,-225.91) 15(127.95,-225.91) 16(147.64,-225.91) 33(147.64,225.91) 34(127.95,225.91) 35(108.27,225.91) 36(88.58,225.91) 37(68.9,225.91) 38(49.21,225.91) 39(29.53,225.91) 40(9.84,225.91) 41(-9.84,225.91) 42(-29.53,225.91) 43(-49.21,225.91) 44(-68.9,225.91) 45(-88.58,225.91) 46(-108.27,225.91) 47(-127.95,225.91) 48(-147.64,225.91)
  oval 60x12 smd: 17(225.91,-147.64) 18(225.91,-127.95) 19(225.91,-108.27) 20(225.91,-88.58) 21(225.91,-68.9) 22(225.91,-49.21) 23(225.91,-29.53) 24(225.91,-9.84) 25(225.91,9.84) 26(225.91,29.53) 27(225.91,49.21) 28(225.91,68.9) 29(225.91,88.58) 30(225.91,108.27) 31(225.91,127.95) 32(225.91,147.64) 49(-225.91,147.64) 50(-225.91,127.95) 51(-225.91,108.27) 52(-225.91,88.58) 53(-225.91,68.9) 54(-225.91,49.21) 55(-225.91,29.53) 56(-225.91,9.84) 57(-225.91,-9.84) 58(-225.91,-29.53) 59(-225.91,-49.21) 60(-225.91,-68.9) 61(-225.91,-88.58) 62(-225.91,-108.27) 63(-225.91,-127.95) 64(-225.91,-147.64)
  silkscreen extent -177,-296 177,177
R0402_LC [mm]
  rect 0.5x0.8 smd: 1(-0.5,0) 2(0.5,0)
  silkscreen extent -0.95,-0.6 0.95,0.6
R0603 [mil]
  rect 30x35 smd: 1(-30,0) 2(30,0)
  silkscreen extent -56,-29 56,29
RES-ADJ-SMD_3P-L3.0-W3.8-P1.75-BR [mm]
  rrect0% 1.2x1.2 smd: 1(1.625,-1) 3(1.625,1)
  rect 1.5x1.6 smd: 2(-1.625,0)
  silkscreen extent -1.75,-1.51 2.92,1.51
RES-ARRAY-SMD_0603-8P-L3.2-W1.6-BL [mm]
  rect 0.65x0.8 smd: 1(-1.2,-0.8) 4(1.2,-0.8) 5(1.2,0.8) 8(-1.2,0.8)
  rect 0.5x0.8 smd: 2(-0.4,-0.8) 3(0.4,-0.8) 6(0.4,0.8) 7(-0.4,0.8)
  silkscreen extent -1.87,-1.45 1.87,1.47
SC-70-6_L2.1-W1.3-P0.65-LS2.3-BR_X [mm]
  rect 1x0.42 smd: 1(1.15,-0.65) 2(1.15,0) 3(1.15,0.65) 4(-1.15,0.65) 5(-1.15,0) 6(-1.15,-0.65)
  silkscreen extent -0.7,-1.34 1.21,1.1
SIP-4P_X [mm]
  rect 2x2 / inner round 2 / far side rect 2x2 hole 0.9: 1(0,0)
  round 2 hole 0.9: 2(2.54,0) 3(5.08,0) 4(7.62,0)
  silkscreen extent -1.27,-1.27 8.89,1.27
SOD-323_L1.8-W1.3-LS2.5-RD [mm]
  rect 1x1 smd: 1(-1.2,0) 2(1.2,0)
  silkscreen extent -1,-0.8 1,0.8
SOP-16 [mm]
  rect 0.75x1.3 smd: 1(-4.445,-3) 2(-3.175,-3) 3(-1.905,-3) 4(-0.635,-3) 5(0.635,-3) 6(1.905,-3) 7(3.175,-3) 8(4.445,-3) 9(4.445,3) 10(3.175,3) 11(1.905,3) 12(0.635,3) 13(-0.635,3) 14(-1.905,3) 15(-3.175,3) 16(-4.445,3)
  silkscreen extent -5.1,-2 5.1,2
SOT-23-6_L2.9-W1.6-P0.95-LS2.8-BL_2 [mm]
  rect 0.532x1.072 smd: 1(-0.95,-1.149) 2(0,-1.149) 3(0.95,-1.149) 4(0.95,1.149) 5(0,1.149) 6(-0.95,1.149)
  silkscreen extent -1.82,-1.45 1.54,0.89
SOT-143-4_L2.9-W1.3-P1.92-LS2.3-BL_6 [mil]
  rect 47x33 smd: 1(-31.5,-41)
  rect 33x33 smd: 2(39.5,-41) 3(39.5,41) 4(-39.5,41)
  silkscreen extent -80,-45 67,15
SOT-223_L6.7-W3.5-P2.30-BR [mm]
  rect 2.2x1.1 smd: 1(3.099,-2.3) 2(3.099,0) 3(3.099,2.3)
  rect 2.2x3.5 smd: 4(-3.099,0)
  silkscreen extent -1.8,-3.55 1.8,3.55
SW-SMD_2P-L6.2-W2.5-LS9.8_1 [mm]
  rect 1.5x1.1 smd: 1(-4.5,0) 2(4.5,0)
  silkscreen extent -3.1,-1.27 3.1,1.27
TF-09PIN [mm]
  rect 0.7x1.5 smd: 1(3.2,14.3) 2(2.1,14.3) 3(1,14.3) 4(-0.1,14.3) 5(-1.2,14.3) 6(-2.3,14.3) 7(-3.4,14.3) 8(-4.5,14.3) 9(-5.588,14.3)
  rect 1.5x1.2 smd: 10(-7.1,13.3)
  rect 1.5x2.5 smd: 11(-6.8,3.7) 12(8.7,3.7)
  rect 2x1.6 smd: 13(8,13.3)
  round 1 hole 1 unplated: 14(4,3.3) 15(-4,3.3)
  silkscreen extent -6.6,-0.8 8.5,14.1
TO-252-2_L6.6-W6.1-P4.57-LS9.9-TL-CW_1 [mm]
  rect 2.8x1.3 smd: 1(-3.292,2.273) 3(-3.292,-2.273)
  rect 6.5x6 smd: 2(3.292,0)
  silkscreen extent -4.26,-3.35 4.51,3.34
TSOT-23-5_L2.9-W1.6-P0.95-LS2.8-BL [mm]
  rect 0.532x1.045 smd: 1(-0.95,-1.147) 2(0,-1.147) 3(0.95,-1.147) 4(0.95,1.147) 5(-0.95,1.147)
  silkscreen extent -1.82,-1.45 1.55,0.9
WH-QFN-28_5X5X05P_9JR [mm]
  rect 0.3x0.875 smd: 1(-1.5,-2.538) 2(-1,-2.538) 3(-0.5,-2.538) 4(0,-2.538) 5(0.5,-2.538) 6(1,-2.538) 7(1.5,-2.538) 15(1.5,2.538) 16(1,2.538) 17(0.5,2.538) 18(0,2.538) 19(-0.5,2.538) 20(-1,2.538) 21(-1.5,2.538)
  rect 0.875x0.3 smd: 8(2.538,-1.5) 9(2.538,-1) 10(2.538,-0.5) 11(2.538,0) 12(2.538,0.5) 13(2.538,1) 14(2.538,1.5) 22(-2.538,1.5) 23(-2.538,1) 24(-2.538,0.5) 25(-2.538,0) 26(-2.538,-0.5) 27(-2.538,-1) 28(-2.538,-1.5)
  rrect0% 2.85x2.85 smd: 29(0,0)
  silkscreen extent -6,-6 6,6
WH-SOD-123 [mil]
  rect 63x27.5 smd: 1(-69.5,0) 2(69.5,0)
  silkscreen extent -28,-24 28,24
Z-506B [mm]
  oval 3.4x1.6 hole 0.8 slot 2.6 at 0 deg: 1(-4.96,1.7) 2(-4.96,-1.7) 3(4.96,1.7) 4(4.96,-1.7)
  silkscreen extent -8,-3.36 8,3.36

## Via types
v1: diameter 32, hole 16, Top to Bottom, 363 vias
v2: diameter 40, hole 20, Top to Bottom, 281 vias